# Altium PCB DIY_DAP_PCB.PcbDoc
Units mil, origin at the board's own origin, x right, y up, seen from the top; angles counter-clockwise.
Board outline 2750 x 2410 mil, 2 copper layers (Top Layer, Bottom Layer); 63 components, 43 nets, 237 pads, 58 vias.
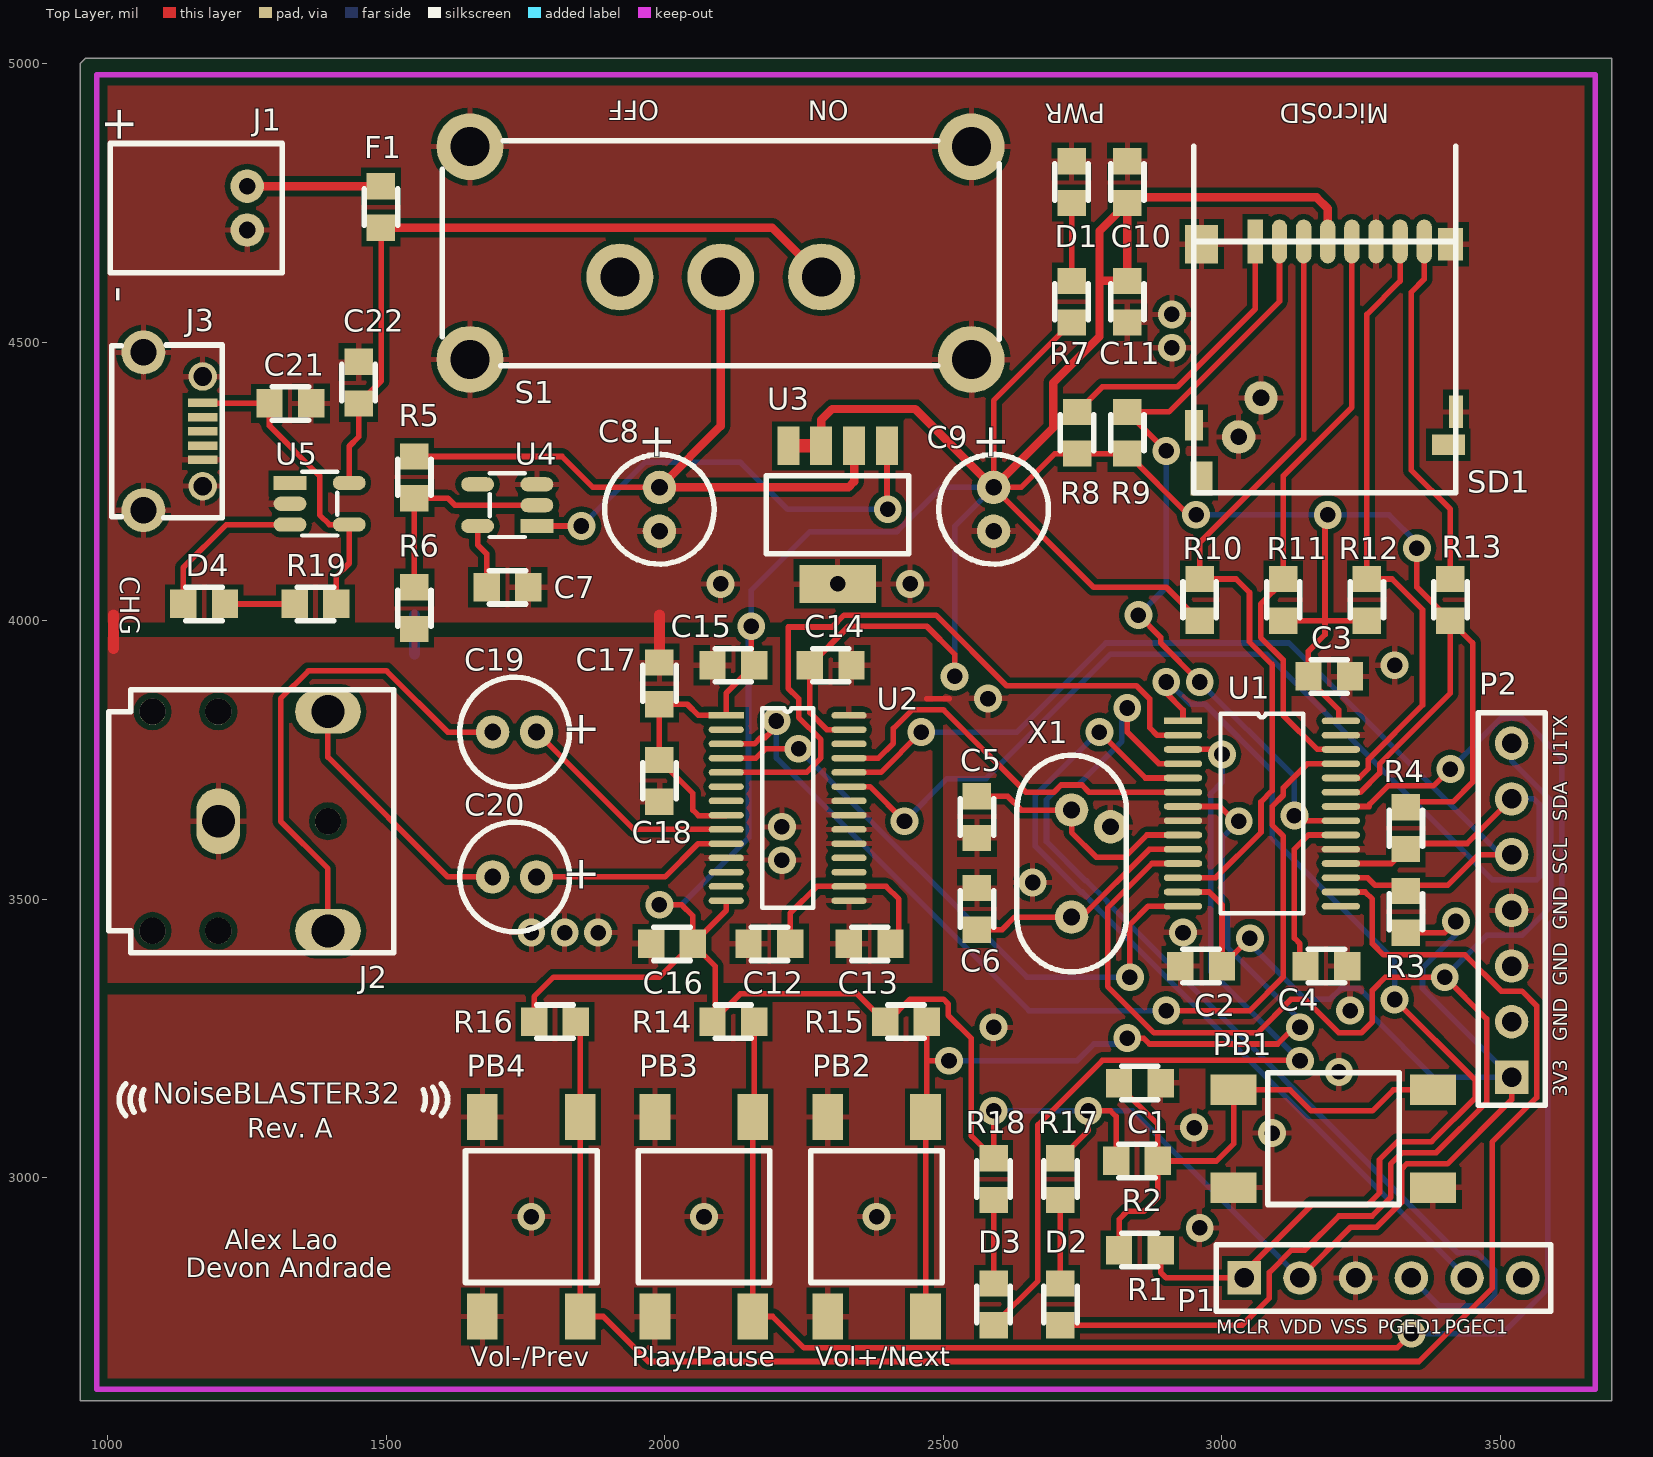
[diagram p0: Top Layer view]
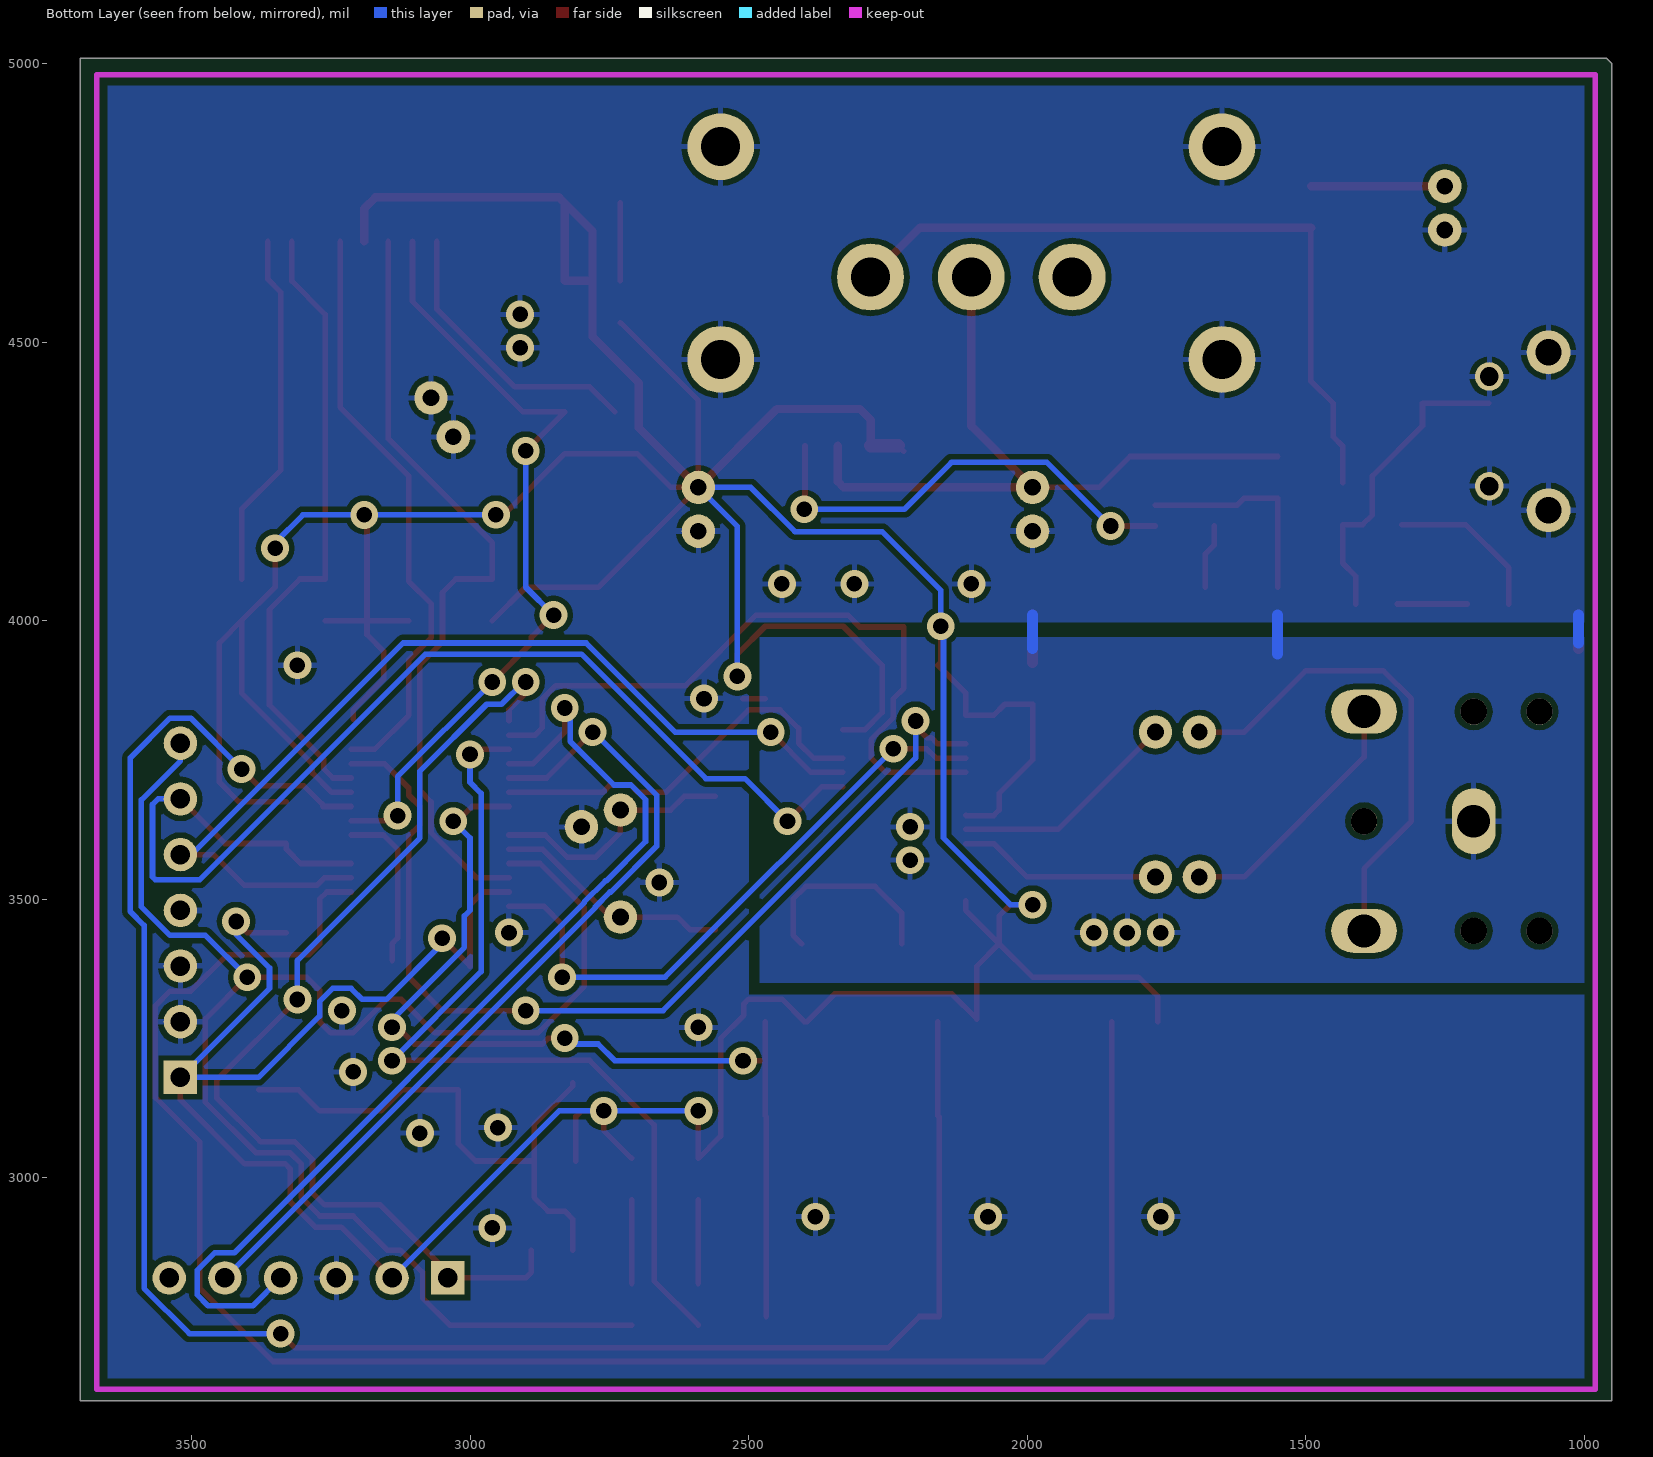
[diagram p1: Bottom Layer view, seen from below]

## Layer stack, top to bottom
Top Layer: signal copper 1.4
Dielectric: dielectric 12.6, FR-4, Dk 4.8
Bottom Layer: signal copper 1.4

## Board outline
950,5000 960,5010 3700,5010 3700,2600 950,2600

## Design rules (kind name [scope] priority, off if disabled: settings)
Clearance [All] p1: gap=10
PolygonConnect [All] p1: connectstyle=Relief reliefconductorwidth=10 reliefentries=4 polygonreliefangle="90 Angle" airgapwidth=10
RoutingVias [All] p1: holewidth=28 width=50 viastyle="Through Hole" minholewidth=28 minwidth=50 maxholewidth=28 maxwidth=50
SolderMaskExpansion [All] p1: expansion=4
Width [All] p1: maxlimit=25 minlimit=10 preferedwidth=10
28 further rules are at their usual default settings.

## Classes and differential pairs
component class DIY_DAP_PCB_Power: C7 C8 C9 C21 C22 D1 D4 F1 J1 J3 R5 R6 R7 R19 S1 U3 U4 U5
component class DIY_DAP_PCB_PIC32: C1 C2 C3 C4 C5 C6 D2 D3 P1 P2 PB1 PB2 PB3 PB4 R1 R2 R3 R4 R14 R15 R16 R17 R18 U1 X1
component class DIY_DAP_PCB_MicroSD: C10 C11 R8 R9 R10 R11 R12 R13 SD1
component class DIY_DAP_PCB_Audio: C12 C13 C14 C15 C16 C17 C18 C19 C20 J2 U2

## Components (designator, comment, footprint, x,y, rotation, side; value= is the part's Value field where it differs from the comment)
C1 "490-1532-1-ND" 0603 2890,3170 r180 top
C2 "490-1532-1-ND" 0603 3000,3380 r180 top
C3 "490-1532-1-ND" 0603 3230,3900 r180 top
C4 "490-7201-6-ND" 0603 3150,3380 r0 top
C5 "1276-1296-1-ND" 0603 2560,3610 r90 top
C6 "1276-1296-1-ND" 0603 2560,3520 r270 top
C7 "490-1532-1-ND" 0603 1680,4060 r0 top
C8 "493-11316-1-ND" 493-11316-1-ND 1990,4200 r270 top
C9 "493-11316-1-ND" 493-11316-1-ND 2590,4200 r270 top
C10 "490-1532-1-ND" 0603 2830,4750 r90 top
C11 "490-7201-6-ND" 0603 2830,4610 r270 top
C12 "490-7201-6-ND" 0603 2150,3420 r0 top
C13 "490-1532-1-ND" 0603 2330,3420 r0 top
C14 "490-1532-1-ND" 0603 2260,3920 r0 top
C15 "490-1532-1-ND" 0603 2160,3920 r180 top
C16 "490-1532-1-ND" 0603 2050,3420 r180 top
C17 "490-7201-6-ND" 0603 1990,3850 r90 top
C18 "490-1532-1-ND" 0603 1990,3750 r270 top
C19 "399-6601-ND" 399-6601-ND 1730,3800 r180 top
C20 "399-6601-ND" 399-6601-ND 1730,3540 r180 top
C21 "490-7201-6-ND" 0603 1290,4390 r0 top
C22 "490-7201-6-ND" 0603 1450,4390 r90 top
D1 "160-1447-1-ND" 0603 2730,4750 r90 top
D2 "160-1447-1-ND" 0603 2710,2810 r270 top
D3 "160-1447-1-ND" 0603 2590,2810 r270 top
D4 "160-1447-1-ND" 0603 1210,4030 r180 top
F1 "SF-0603S080-2CT-ND" 0603 1490,4780 r270 top
J1 "455-1719-ND" 455-1719-ND 1250,4780 r180 top
J2 "CP1-3523N-ND" CP1-3523N-ND 1080,3640 r0 top
J3 "609-4618-1-ND" 609-4618-1-ND 1170,4340 r0 top
P1 "6 Pin PIC Programming Header" "PIC32 Programming Header" 3740,2820 r270 top
P2 "IO Header" "IO Header" 3520,3880 r0 top
PB1 "450-1129-ND" 450-1129-ND 3200,3070 r90 top
PB2 "450-1129-ND" 450-1129-ND 2380,2930 r0 top
PB3 "450-1129-ND" 450-1129-ND 2070,2930 r0 top
PB4 "450-1129-ND" 450-1129-ND 1760,2930 r0 top
R1 "311-1.00KHRCT-ND" 0603 2890,2870 r180 top
R2 "311-10KGRCT-ND" 0603 2810,3030 r0 top
R3 "311-1.00KHRCT-ND" 0603 3330,3440 r90 top
R4 "311-1.00KHRCT-ND" 0603 3330,3590 r90 top
R5 "311-22KGRCT-ND" 0603 1550,4220 r90 top
R6 "311-75.0KHRCT-ND" 0603 1550,4060 r270 top
R7 "311-1.00KHRCT-ND" 0603 2730,4610 r270 top
R8 "311-10KGRCT-ND" 0603 2740,4300 r90 top
R9 "311-10KGRCT-ND" 0603 2830,4300 r90 top
R10 "311-10KGRCT-ND" 0603 2960,4000 r90 top
R11 "311-10KGRCT-ND" 0603 3110,4000 r90 top
R12 "311-10KGRCT-ND" 0603 3260,4000 r90 top
R13 "311-10KGRCT-ND" 0603 3410,4000 r90 top
R14 "311-10KGRCT-ND" 0603 2160,3280 r180 top
R15 "311-10KGRCT-ND" 0603 2470,3280 r180 top
R16 "311-10KGRCT-ND" 0603 1840,3280 r180 top
R17 "311-1.00KHRCT-ND" 0603 2710,2960 r90 top
R18 "311-1.00KHRCT-ND" 0603 2590,2960 r90 top
R19 "311-1.00KHRCT-ND" 0603 1410,4030 r180 top
S1 "CWI395-ND" CWI395-ND 2100,4660 r180 top
SD1 "114-00841-68-1-ND" 114-00841-68-1-ND 3420,4230 r90 top
U1 "PIC32MX270" PIC32MX270F256B-50I/SS-ND 2930,3820 r0 top
U2 "296-11658-5-ND" 296-11658-5-ND 2110,3830 r0 top
U3 "LP3964EMP-3.3/NOPBCT-ND" LP3964EMP-3.3/NOPBCT-ND 2310,4190 r180 top
U4 "LM8365BALMF27/NOPBCT-ND" LM8365BALMF27/NOPBCT-ND 1770,4170 r180 top
U5 "MAX1555EZK+TCT-ND" MAX1555EZK+TCT-ND 1380,4210 r0 top
X1 "887-1592-ND" 887-1592-ND 2730,3660 r270 top

## Footprints (in the part's own frame and the unit in brackets; to place one, negate y for a bottom-side part, rotate by r counter-clockwise, add the part's x,y. Pads: shape width x height; smd on the part's side, far side on the other; paste and mask are expansions set on the pad)
114-00841-68-1-ND [mm]
  rect 1.4x0.8 smd: 0(3.075,11.944)
  rect 1.5x0.648 smd: 0(3.684,-0.006)
  rect 1.5x1.148 smd: 0(11.323,0.244)
  rect 1.75x1.5 smd: 0(11.325,11.594)
  rect 2x0.7 smd: 1(11.45,9.144)
  oval 2x0.7 smd: 2(11.45,8.044) 3(11.45,6.944) 4(11.45,5.844) 5(11.45,4.744) 6(11.45,3.644) 7(11.45,2.544) 8(11.45,1.444)
  rect 1.55x1 smd: 9(0.65,11.594)
  rect 0.949x1.5 smd: 9(2.184,0.344)
  silkscreen extent 0,0 15.8,11.95
296-11658-5-ND [mm]
  rect 1.6x0.3 smd: 1(0,0)
  oval 1.6x0.3 smd: 2(0,-0.65) 3(0,-1.3) 4(0,-1.95) 5(0,-2.6) 6(0,-3.25) 7(0,-3.9) 8(0,-4.55) 9(0,-5.2) 10(0,-5.85) 11(0,-6.5) 12(0,-7.15) 13(0,-7.8) 14(0,-8.45) 15(5.6,-8.45) 16(5.6,-7.8) 17(5.6,-7.15) 18(5.6,-6.5) 19(5.6,-5.85) 20(5.6,-5.2) 21(5.6,-4.55) 22(5.6,-3.9) 23(5.6,-3.25) 24(5.6,-2.6) 25(5.6,-1.95) 26(5.6,-1.3) 27(5.6,-0.65) 28(5.6,0)
  silkscreen extent 1.63,-8.78 3.97,0.33
399-6601-ND [mil] "100 uF Capacitor"
  round 60 hole 30: 1(-39.37,0) 2(39.37,0)
  silkscreen extent -98,-98 98,98
450-1129-ND [mm]
  rect 1.4x2.1 smd: 1(-2.23,4.55) 1(-2.23,-4.55) 2(2.23,4.55) 2(2.23,-4.55)
  silkscreen extent -3,-3 3,3
455-1719-ND [mil]
  round 60 hole 30: 1(0,0) 2(0,78.74)
  silkscreen extent -63,-77 246,156
493-11316-1-ND [mil] "47 uF Capacitor"
  round 60 hole 30: 1(-39.37,0) 2(39.37,0)
  silkscreen extent -98,-98 98,98
0603 [mm]
  rect 1.2x1.3 smd: 1(0,0) 2(1.9,0)
  silkscreen extent 0.13,-0.76 1.78,0.76
609-4618-1-ND [mm]
  round 2 hole 1.2: 0(-2.7,-3.6) 0(-2.7,3.6)
  round 1.3 hole 0.85: 0(0,-2.5) 0(0,2.5)
  rect 1.35x0.387 smd: 1(0,1.3) 2(0,0.65) 3(0,0) 4(0,-0.65) 5(0,-1.3)
  silkscreen extent -4.15,-3.94 0.89,3.94
887-1592-ND [mil]
  round 60 hole 30: 1(0,0) 2(192.13,0)
  silkscreen extent -98,-98 290,98
CP1-3523N-ND [mm]
  round 1.2 hole 1.2: 0(0,-5) 0(0,5) 0(3,-5) 0(3,5) 0(8,0)
  oval 2x3 hole 1.5: 1(3,0)
  oval 3x2 hole 1.5: 2(8,-5) 3(8,5)
  silkscreen extent -2,-6 11,6
CWI395-ND [mil]
  round 120 hole 70: 0(-450,-191) 0(-450,191) 0(450,-191) 0(450,191) 1(-181,43) 2(0,43) 3(181,43)
  silkscreen extent -500,-202 500,202
"IO Header" [mil]
  rect 60x60 hole 35: 1(0,-700)
  round 60 hole 35: 2(0,-600) 3(0,-500) 4(0,-400) 5(0,-300) 6(0,-200) 7(0,-100)
  silkscreen extent -60,-750 60,-45
LM8365BALMF27/NOPBCT-ND [mm]
  rect 1.5x0.65 smd: 1(0,0)
  oval 1.5x0.65 smd: 2(0,-0.95) 3(0,-1.9) 4(2.7,-1.9) 5(2.7,0)
  silkscreen extent 0.55,-2.4 2.15,0.5
LP3964EMP-3.3/NOPBCT-ND [mm]
  rect 1x1.75 smd: 1(-2.25,-3.15) 2(-0.75,-3.15) 3(0.75,-3.15) 4(2.25,-3.15)
  rect 3.5x1.75 smd: 5(0,3.15)
  silkscreen extent -3.25,-1.78 3.25,1.78
MAX1555EZK+TCT-ND [mm]
  rect 1.5x0.65 smd: 1(-1.35,0.95)
  oval 1.5x0.65 smd: 2(-1.35,0) 3(-1.35,-0.95) 4(1.35,-0.95) 5(1.35,0.95)
  silkscreen extent -0.8,-1.45 0.8,1.45
"PIC32 Programming Header" [mil]
  rect 60x60 hole 35: 1(0,-700)
  round 60 hole 35: 2(0,-600) 3(0,-500) 4(0,-400) 5(0,-300) 6(0,-200)
  silkscreen extent -60,-750 60,-150
PIC32MX270F256B-50I/SS-ND [mm]
  rect 1.75x0.3 smd: 1(0,0)
  oval 1.75x0.3 smd: 2(0,-0.65) 3(0,-1.3) 4(0,-1.95) 5(0,-2.6) 6(0,-3.25) 7(0,-3.9) 8(0,-4.55) 9(0,-5.2) 10(0,-5.85) 11(0,-6.5) 12(0,-7.15) 13(0,-7.8) 14(0,-8.45) 15(7.2,-8.45) 16(7.2,-7.8) 17(7.2,-7.15) 18(7.2,-6.5) 19(7.2,-5.85) 20(7.2,-5.2) 21(7.2,-4.55) 22(7.2,-3.9) 23(7.2,-3.25) 24(7.2,-2.6) 25(7.2,-1.95) 26(7.2,-1.3) 27(7.2,-0.65) 28(7.2,0)
  silkscreen extent 1.71,-8.78 5.49,0.33

## Part data
C1 C2 C3 C7 C10 C13 C14 C15 C16 C18: "0603 0.1 uF - 16V - Ceramic Capacitor"
C4 C11 C12 C17 C21 C22: "0603 10 uF - 16V - Ceramic Capacitor"
C5 C6: "0603 15 pF - 50V - Ceramic Capacitor"
C8 C9: "47 uF - 10V - Electrolytic Capacitor"
C19 C20: "100 uF - 16V - Electrolytic Capacitor"
D1 D2 D3 D4: "Green LED (0603)"
F1: "800 mA 32VDC Fuse"
J1: "JST-PH Battery Connector"
J2: "3.5mm Audio Jack"
J3: "USB Micro-B"
PB1 PB2 PB3 PB4: "Momentary Push button"
R1 R3 R4 R7 R17 R18 R19: "1k Ohm Resistor"
R2 R8 R9 R10 R11 R12 R13 R14 R15 R16: "10k Ohm Resistor"
R5: "22k Ohm Resistor"
R6: "75k Ohm Resistor"
SD1: "MicroSD Card Slot"
U1: library part PIC32MX270F256B-50I/SS-ND, "PIC32MX270F256B"
U2: "TLV320DAC23PW"
U3: "3.3V LDO"
U4: "Undervoltage Reset Controller"
U5: "LiPo Charger"
X1: "16.9344 Mhz Crystal"

## Free pads (board coordinates)
  round 60 hole 30: 1(2800,3630) 2(3030,4330) 3(3070,4400)

## Via types
v1: diameter 50, hole 28, Top Layer to Bottom Layer, 58 vias

## Nets (pads, with @x,y where several pads share a name; then routed paths per layer and width w, separated by ;. In a path a pad name is that pad's centre, name@x,y a point inside that pad or via, vN(x,y) a via of type N, cw(c..) or ccw(c..) an arc to the next point about the centre after c; other vN are vias at no path point)
3V3: C2.1 C3.2 C9.1 C10.1 C11.1 C14.1 C15.1 C16.1 C17.1 C18.1 P1.2 P2.1 R2.1 R3.1 R4.2 R7.2 R8.1 R9.1 R10.1 R11.1 R12.1 R13.1 R14.2 R15.2 R16.2 R17.2 R18.2 SD1.4 U1.13 U1.23 U1.28 U2.1 U2.8 U2.14 U2.27 U3.3 U3.4 | length 12055
  Top Layer w10: R16.2 1765.2,3325.2 1800,3360 1990,3360 C16.1 ; v1(1990,3490) 2030,3490 2050,3470 C16.1 ; U2.14 2110,3480 C16.1 ; U2.8 2109.13,3650 2060,3650 2050,3660 2050,3690 C18.1 C17.1 2040,3850 2060,3830 U2.1 2110,3870 C15.1 2155,3925 v1(2155,3990) ; U3.4@2221.42,4304.02 U3.4@2231.42,4314.02 ; U2.27 2290.44,3804.41 2260,3834.85 C14.1 2330,3990 2470,3990 2520,3940 v1(2520,3900) ; v1(2590,3120) R18.2 2550,3074.8 2550,3250 2508.62,3291.38 2508.62,3311.8 2499.84,3320.59 2440.16,3320.59 2399.57,3280 R15.2 2345.2,3330 2135.2,3330 2090,3284.8 2090,3380 C16.1 ; R17.2 2760,3084.8 v1(2760,3120) 2800,3120 2810,3110 R2.1 ; R7.2 2590,4395.2 C9.1 ; U1.13 2977.09,3512.91 3000,3490 C2.1 v1(3050,3430) ; v1(2953.51,4190.08) 2953.43,4190 2940,4190 R9.1 R8.1 2700,4300 2639.37,4239.37 C9.1 ; R10.1 2900,4060 2769.37,4060 C9.1 ; R11.1 3185,4000 ; P1.2 3231.23,2911.23 3277.8,2911.23 3322.8,2956.23 3322.8,3015.98 3331.58,3024.76 3404.76,3024.76 3520,3140 P2.1 ; v1(3190,4190) 3180,4190 3185,4185 3185,4000 ; U1.28@3210,3823.46 3210,3840 3155.2,3894.8 C3.2 3155.2,3945.2 3185,3975 3185,4000 ; U1.23 3248.68,3692.05 3282.91,3726.28 3282.91,3742.91 3410,3870 R13.1 ; R12.1 3185,4000 ; R3.1 3400,3440 v1(3420,3460) ; R4.2@3330,3674.8 3414.8,3674.8 3450,3710 3450,3960 R13.1 ; v1(3350,4130) 3350,4060 R13.1
  Top Layer w15: U3.3 2280.47,4360.47 2300,4380 2449.37,4380 C9.1 2696.91,4346.28 2696.91,4426.91 2780,4510 2780,4610 ; SD1.4 3189.92,4740.08 3170,4760 2840,4760 C10.1 ; 2780,4610 C11.1 C10.1 ; 2780,4610 2780,4700 C10.1
  Top Layer w25: U3.4@2231.42,4314.02 U3.3
  Bottom Layer w10: v1(1990,3490) 2030,3490 2150,3610 2150,3985 v1(2155,3990) 2155,4055 2260,4160 2416.57,4160 2495.94,4239.37 C9.1 2520,4169.37 v1(2520,3900) ; v1(2590,3120) v1(2760,3120) 2840,3120 P1.2 ; v1(2953.51,4190.08) 3179.92,4190.08 3180,4190 v1(3190,4190) 3300,4190 3350,4140 v1(3350,4130) ; v1(3050,3430) 3050,3420 3150,3320 3193.43,3320 3213.43,3340 3246.57,3340 3270,3316.57 3270,3290 3380,3180 P2.1@3500,3180 ; v1(3420,3460) 3420,3436.57 3360,3376.57 3360,3340 P2.1
AGND: C1.1 C2.2 C3.1 C4.2 C5.1 C6.1 C7.2 C8.2 C9.2 C10.2 C11.2 C12.1 C13.1 C14.2 C15.2 C16.2 C17.2 C18.2 C21.2 C22.2 D1.2 J1.2 J2.1 J3.0 J3.5 P1.3 P2.2 P2.3 P2.4 pad.1 pad.2 pad.3 PB1.1 PB2.1 PB3.1 PB4.1 R6.2 S1.0 SD1.0 SD1.6 U1.8 U1.19 U1.27 U2.11 U2.15 U2.19 U2.20 U2.21 U2.22 U2.28 U3.5 U4.3 U5.2 | length 365.2
  Top Layer w10: 2470,3860 2510,3860
  Top Layer w20: 1010,3950 1010,4010 ; C17.2 1990,4010
  Bottom Layer w20: 1010,3960 1010,4010 ; 1550,3940 1550,4010 ; 1990,3950 1990,4010
  other v1: 2960,2910 1760,2930 2070,2930 2380,2930 3090,3080 2950,3090 3210,3190 2590,3270 3230,3300 1760,3440 1820,3440 1880,3440 2930,3440 2660,3530 2210,3570 2210,3630 2580,3860 3310,3920 2100,4065.98 2310,4065.98 2440,4065.98 2910,4490 2910,4550
BTN_1: PB3.2 R14.1 U1.22 | length 3481.3
  Top Layer w10: R14.1 2160,3111.34 2157.8,3109.13 2157.8,2750.87 2193.31,2750.87 2249.65,2694.53 3314.53,2694.53 v1(3340,2720) ; U1.22 3264.74,3666.46 3264.74,3669.97 3298.2,3703.43 3379.79,3703.43 v1(3410,3733.64)
  Bottom Layer w10: v1(3340,2720) 3503.64,2720 3585,2801.36 3585,3453.08 3610,3478.08 3610,3753.64 3538.64,3825 3501.36,3825 v1(3410,3733.64)
BTN_2: PB4.2 R16.1 U1.16 | length 3277.7
  Top Layer w10: R16.1@1847.8,3280 1847.8,3109.13 1847.8,2750.87 1889.13,2750.87 1970,2670 3353.64,2670 3485,2801.36 3485,3063.79 3565,3143.79 3565,3308.64 3538.64,3335 3501.36,3335 3436.36,3400 3290,3400 3270,3420 3270,3500 3257.09,3512.91 U1.16
BTN_3: PB2.2 R15.1 U1.7 | length 1815.4
  Top Layer w10: PB2.2@2467.8,2750.87 2467.8,3109.13 2470,3111.34 2470,3210 ; R15.1 2470,3210 ; v1(2510,3210) 2470,3210 ; v1(2830,3250.59) 2859.33,3250.59 2869.92,3240 3100,3240 3140,3280 v1@3140,3265 ; U1.7 2996.46,3666.46 3022.91,3640 v1(3030,3640)
  Bottom Layer w10: v1(2510,3210) 2740,3210 2770,3240 2830,3240 v1(2830,3250.59) ; v1(3030,3640) 3000,3610 3000,3480 3010,3470 3010,3413.43 3140,3283.43 v1@3140,3265
  other v1: 3140,3270
I2C_SCL: P2.5 R3.2 U1.17 U2.24 | length 1778.2
  Top Layer w10: U2.24 2387.64,3727.64 v1(2460,3800) ; U1.17 3261.5,3538.5 3275.2,3524.8 3330,3524.8 3405.2,3524.8 3460.39,3580 P2.5
  Bottom Layer w10: v1(2460,3800) 2631.72,3800 2791.72,3960 3120,3960 3500,3580 P2.5
I2C_SDA: P2.6 R4.1 U1.18 U2.23 | length 2103.9
  Top Layer w10: U2.23 2367.95,3702.05 v1(2430,3640) ; U1.18 3304.09,3564.09 R4.1 3330,3600 3440,3600 P2.6
  Bottom Layer w10: v1(2430,3640) 2506.57,3716.57 2576.57,3716.57 2800,3940 3080,3940 3485,3535 3565,3535 3570,3540 3570,3670 3560,3680 P2.6
I2S_BCLK: U1.25 U2.3 | length 1780.1
  Top Layer w10: U2.3 2160.53,3778.82 2171.72,3790 2180,3790 2190,3800 v1@2190,3820 ; v1(2900,3300) 3050,3300 3110,3360 3110,3613.43 3090,3633.43 3090,3666.57 3110,3686.57 3110,3700 3153.23,3743.23 U1.25
  Bottom Layer w10: v1@2190,3820 2200,3810 2200,3753.43 2653.43,3300 v1(2900,3300)
  other v1: 2200,3820
I2S_LRC: U1.2 U2.5 | length 1277.3
  Top Layer w10: U2.5 2254.21,3727.64 2280,3753.43 2280,3786.57 2240,3826.57 2240,3860 2221.38,3878.62 2221.38,3988.62 2300.34,3988.62 2321.72,4010 2486.57,4010 2613.34,3883.23 2846.57,3883.23 2870,3859.8 2870,3807.88 2883.47,3794.41 U1.2
I2S_SDO: U1.14 U2.4 | length 1129
  Top Layer w10: U2.4 2163.23,3753.23 2180,3770 v1(2240,3770) ; U1.14 2867.32,3487.32 2834.77,3454.77 v1(2834.77,3360) ; v1(2834.77,3360) 2834.77,3354.77 2830,3350 2830,3355.23 v1(2834.77,3360)
  Bottom Layer w10: v1(2240,3770) 2650,3360 v1(2834.77,3360)
LED: D3.2 U1.3 | length 1609.2
  Top Layer w10: D3.2 2669.41,2814.61 2669.41,3094.64 2785.36,3210.59 v1@3140,3210.59 ; U1.3 2991.18,3768.82 v1(3000,3760)
  Bottom Layer w10: v1(3000,3760) 3000,3710 2980,3690 2980,3370 v1(3140,3210)
MCLR: P1.1 R1.1 U1.1 | length 1860.4
  Top Layer w10: R1.1 2890,2830 2900,2820 P1.1 3040,2830 3161.23,2951.23 3261.23,2951.23 3282.8,2972.8 3282.8,3032.55 3315.01,3064.76 3376.21,3064.76 3455,3143.55 3455,3175 v1(3310,3320) ; v1(2900,3890) 2900,3870 2930,3840 U1.1
  Bottom Layer w10: v1(2900,3890) 2903.43,3890 2943.43,3850 2970,3850 3090,3730 3090,3610 3310,3390 v1(3310,3320)
NetC1_2: C1.2 PB1.2 R1.2 R2.2 | length 1010.6
  Top Layer w10: R1.2 2815.2,2925.2 2830,2940 2860,2940 2884.8,2964.8 R2.2 ; C1.2 2815.2,3164.8 2884.8,3095.2 R2.2 ; PB1.2@3379.13,3157.8 3307.8,3157.8 3270,3120 3160,3120 3122.2,3157.8 3020.87,3157.8 3020.87,3060.87 2990,3030 R2.2
NetC4_1: C4.1 U1.20 | length 298.1
  Top Layer w10: C4.1@3140,3390 3140,3420 3130,3430 3130,3590 3155.28,3615.28 U1.20
NetC7_1: C7.1 U4.5 | length 116.8
  Top Layer w10: U4.5 1663.7,4136.3 1680,4120 C7.1
NetC12_2: C12.2 C13.2 U2.16 | length 365.7
  Top Layer w10: C12.2 2224.8,3474.8 2272.91,3522.91 U2.16 2397.09,3522.91 2420,3500 2420,3435.2 C13.2
NetC19_1: C19.1 U2.9 | length 413
  Top Layer w10: C19.1 1944.09,3625.28 U2.9
NetC19_2: C19.2 J2.2 | length 898.9
  Top Layer w10: J2.2 1394.96,3555.04 1310,3640 1310,3860 1360,3910 1500,3910 1610,3800 C19.2
NetC20_1: C20.1 U2.10 | length 365.4
  Top Layer w10: C20.1 2000,3540 2059.68,3599.68 U2.10
NetC20_2: C20.2 J2.3 | length 466.6
  Top Layer w10: J2.3 1394.96,3755.04 1610,3540 C20.2
NetC21_1: C21.1 J3.1 R19.1 U5.4 | length 568.6
  Top Layer w10: J3.1@1171.18,4390 C21.1 1290,4350 1380,4260 1380,4190 1397.4,4172.6 U5.4 1433.15,4103.15 1410,4080 R19.1
NetD1_1: D1.1 R7.1 | length 140
  Top Layer w10: R7.1 D1.1
NetD2_1: D2.1 R17.1 | length 150
  Top Layer w10: D2.1 R17.1
NetD3_1: D3.1 R18.1 | length 150
  Top Layer w10: D3.1 R18.1
NetD4_1: D4.1 R19.2 | length 125.2
  Top Layer w10: D4.1 R19.2
NetD4_2: D4.2 U5.3 | length 288.9
  Top Layer w10: D4.2 1135.2,4095.2 1212.6,4172.6 U5.3
NetF1_1: F1.1 J1.1 | length 215
  Top Layer w15: J1.1@1275,4780 F1.1
NetR5_1: R5.1 R6.1 U4.2 | length 385.2
  Top Layer w10: R6.1 R5.1 1610,4220 1622.6,4207.4 U4.2
NetR8_2: R8.2 SD1.1 | length 517.5
  Top Layer w10: R8.2 2785.2,4420 2920,4420 3060,4560 SD1.1
NetR13_2: R13.2 SD1.8 | length 644.6
  Top Layer w10: SD1.8 3363.15,4613.15 3340,4590 3340,4270 3410,4200 R13.2
NetU3_1: U3.1 U4.1 | length 826.9
  Top Layer w10: U4.1 v1(1850,4170) ; U3.1 2398.58,4201.42 v1(2400,4200)
  Bottom Layer w10: v1(1850,4170) 1964.37,4284.37 2135.63,4284.37 2220,4200 v1(2400,4200)
OSC1: C5.2 U1.9 X1.1 | length 455
  Top Layer w10: C5.2 2615.2,3684.8 2640,3660 X1.1 2730,3620 2774.32,3575.68 2825.68,3575.68 2865.28,3615.28 U1.9
OSC2: C6.2 U1.10 X1.2 | length 429.8
  Top Layer w10: C6.2 2605.2,3445.2 2627.87,3467.87 X1.2 2747.87,3467.87 2869.68,3589.68 U1.10
PGEC1: P1.5 U1.5 | length 1534.8
  Top Layer w10: v1(2780,3800) 2862.36,3717.64 U1.5
  Bottom Layer w10: v1(2780,3800) 2778.08,3800 2665,3686.92 2665,3595 2747.13,3512.87 2748.64,3512.87 2775,3486.51 2775,3485 P1.5
PGED1: P1.4 U1.4 | length 1838.5
  Top Layer w10: v1@2830,3850 v1(2830,3843.23) 2830,3800 2886.77,3743.23 U1.4
  Bottom Layer w10: v1(2830,3843.23) 2820,3833.23 2820,3783.43 2741.57,3705 2711.36,3705 2685,3678.64 2685,3603.28 2755.41,3532.87 2756.92,3532.87 2795,3494.8 2795,3493.28 3423.28,2865 3458.64,2865 3490,2833.64 3490,2790 3470,2770 3390,2770 P1.4
REFCLKO: U1.6 U2.25 | length 723
  Top Layer w10: U2.25 2383.23,3753.23 2410,3780 2410,3806.57 2443.43,3840 2500,3840 2647.95,3692.05 2698.41,3692.05 2711.36,3705 2748.64,3705 2761.59,3692.05 U1.6
SD_CSN: R9.2 SD1.2 U1.21 | length 1427.8
  Top Layer w10: v1(2850,4010) 2890,3970 2890,3960 v1(2960,3890) ; v1(2900,4304.8) R9.2 2904.8,4374.8 3103.31,4573.31 SD1.2 ; v1@3139.13,3640.87 U1.21
  Bottom Layer w10: v1(2850,4010) 2900,4060 v1(2900,4304.8) ; v1(2960,3890) 3130,3720 v1(3130,3650)
SD_MISO: R12.2 SD1.7 U1.24 | length 1135.6
  Top Layer w10: U1.24 3245.98,3717.64 3262.91,3734.57 3262.91,3751.2 3360,3848.28 3360,4020 3305.2,4074.8 R12.2 3260,4550 3319.84,4609.84 SD1.7
SD_MOSI: R10.2 SD1.3 U1.12 | length 1412.2
  Top Layer w10: U1.12 2988.5,3538.5 3070,3620 3070,3674.85 3090,3694.85 3090,3921.29 3049.41,3961.88 3049.41,4050.59 3025.2,4074.8 R10.2 2960,4140 3146.61,4326.61 SD1.3
SD_SCK: R11.2 SD1.5 U1.26 | length 1064.3
  Top Layer w10: U1.26 3171.18,3768.82 3110,3830 3110,3929.57 3069.41,3970.16 3069.41,4029.84 3110,4070.43 R11.2 3110,4260 3233.23,4383.23 SD1.5
U1TX: D2.2 P2.7 U1.11 | length 2886.9
  Top Layer w10: D2.2 3036.41,2735.2 3085,2783.79 3085,2830 3125,2870 3148.53,2870 3209.76,2931.23 3269.51,2931.23 3302.8,2964.51 3302.8,3024.26 3323.3,3044.76 3384.5,3044.76 3475,3135.27 3475,3285 v1(3400,3360) 3293.43,3360 3270,3336.57 3270,3280 3250,3260 3210,3260 3150,3320 3123.43,3320 3063.43,3260 2878.2,3260 2794.77,3343.43 2794.77,3484.46 2874.41,3564.09 U1.11
  Bottom Layer w10: v1(3400,3360) 3475,3435 3538.64,3435 3590,3486.36 3590,3678.28 3520,3748.28 P2.7
VBAT: C8.1 R5.2 S1.2 U3.2 | length 1304.4
  Top Layer w10: R5.2 1815.2,4294.8 1870.63,4239.37 C8.1
  Top Layer w15: S1.2 2100,4349.37 C8.1 2329.37,4239.37 2339.53,4249.53 U3.2
VCHARGE: C22.1 F1.2 S1.1 U5.5 | length 1309.4
  Top Layer w10: U5.5 1433.15,4313.15 1450,4330 C22.1 1490.59,4430.59 1490.59,4704.61 F1.2
  Top Layer w15: F1.2 2192.8,4705.2 S1.1
pads on no net: J2.0 J3.2 J3.3 J3.4 P1.6 S1.3 SD1.9 U1.15 U2.2 U2.6 U2.7 U2.12 U2.13 U2.17 U2.18 U2.26 U4.4 U5.1

## Polygon pours and split planes (outlines as drawn)
AGND on Top Layer "Bottom Layer-No Net" (solid, pour order 8): 1000,3970 2480,3970 2480,3350 1000,3350
AGND on Top Layer "Bottom Layer-No Net" (solid, pour order 6): 1000,4960 3650,4960 3650,2640 1000,2640 1000,3328.33 2500,3328.33 2500,3997 1000,3997
AGND on Bottom Layer "Bottom Layer-No Net" (solid, pour order 12): 1000,3350 2480,3350 2480,3970 1000,3970
AGND on Bottom Layer "Bottom Layer-No Net" (solid, pour order 10): 1000,4960 3650,4960 3650,2640 1000,2640 1000,3328.33 2500,3328.33 2500,3997 1000,3997

## Keep-outs
Keep-Out Layer:
  lines w10: 980,2620 3670,2620 3670,4980 980,4980 980,2620

## Silkscreen, mask and mechanical layers (free items; w line width, h text height)
Top Overlay:
  lines w10: 1031.72,3111.72 cw(c1060,3140) 1031.72,3168.28 ; 1046.72,3117.81 cw(c1080,3140) 1046.72,3162.19 ; 1064.22,3122.11 cw(c1100,3140) 1064.22,3157.89 ; 1565.78,3122.11 ccw(c1530,3140) 1565.78,3157.89 ; 1583.28,3117.81 ccw(c1550,3140) 1583.28,3162.19 ; 1598.28,3111.72 ccw(c1570,3140) 1598.28,3168.28
  text "PWR" at 2790,4940 h60 r180
  text "CHG" at 1010,4080 h60 r270
  text "NoiseBLASTER32" at 1080,3120 h65
  text "Rev. A" at 1250,3060 h60
  text "Alex Lao" at 1210,2860 h60
  text "Devon Andrade" at 1140,2810 h60
  text "Vol-/Prev" at 1650,2650 h60
  text "Play/Pause" at 1940,2650 h60
  text "Vol+/Next" at 2270,2650 h60

## Text inside footprints (layer, text, board x,y; h text height)
C8: Top Overlay "+" at 1960,4355 h60 r270
C9: Top Overlay "+" at 2560,4355 h60 r270
C19: Top Overlay "+" at 1885,3830 h60 r180
C20: Top Overlay "+" at 1885,3570 h60 r180
J1: Top Overlay "+" at 995,4925 h60 r270; Top Overlay "-" at 995,4600 h60 r270
P1: Top Overlay "MCLR" at 2990,2720 h25; Top Overlay "VDD" at 3105,2720 h25; Top Overlay "PGED1" at 3280,2720 h25; Top Overlay "VSS" at 3195,2720 h25; Top Overlay "PGEC1" at 3400,2720 h25
P2: Top Overlay "U1TX" at 3620,3740 h25 r90; Top Overlay "SDA" at 3620,3640 h25 r90; Top Overlay "GND" at 3620,3245 h25 r90; Top Overlay "SCL" at 3620,3545 h25 r90; Top Overlay "3V3" at 3620,3145 h25 r90; Top Overlay "GND" at 3620,3345 h25 r90; Top Overlay "GND" at 3620,3445 h25 r90
S1: Top Overlay "ON" at 2330,4945 h60 r180; Top Overlay "OFF" at 1990,4945 h60 r180
SD1: Top Overlay "MicroSD" at 3300,4940 h60 r180